# Altium PCB Nahid's.PcbDoc
Units mil, origin at the board's own origin, x right, y up, seen from the top; angles counter-clockwise.
Board outline 2185 x 830 mil, 2 copper layers (Top Layer, Bottom Layer); 13 components, 7 nets, 47 pads, 11 vias.
Unrouted connection lines stored in the file: 2.
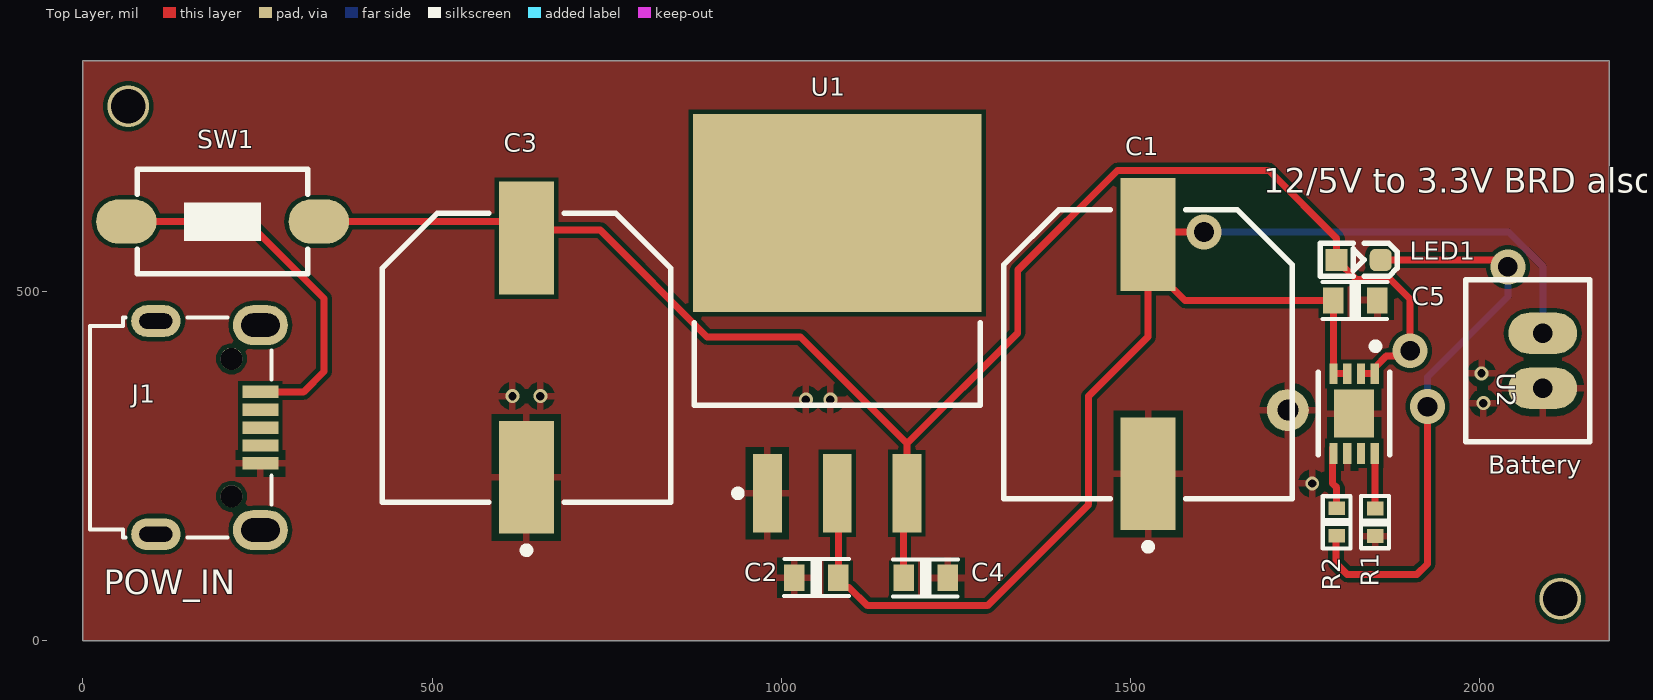
[diagram p0: Top Layer view]
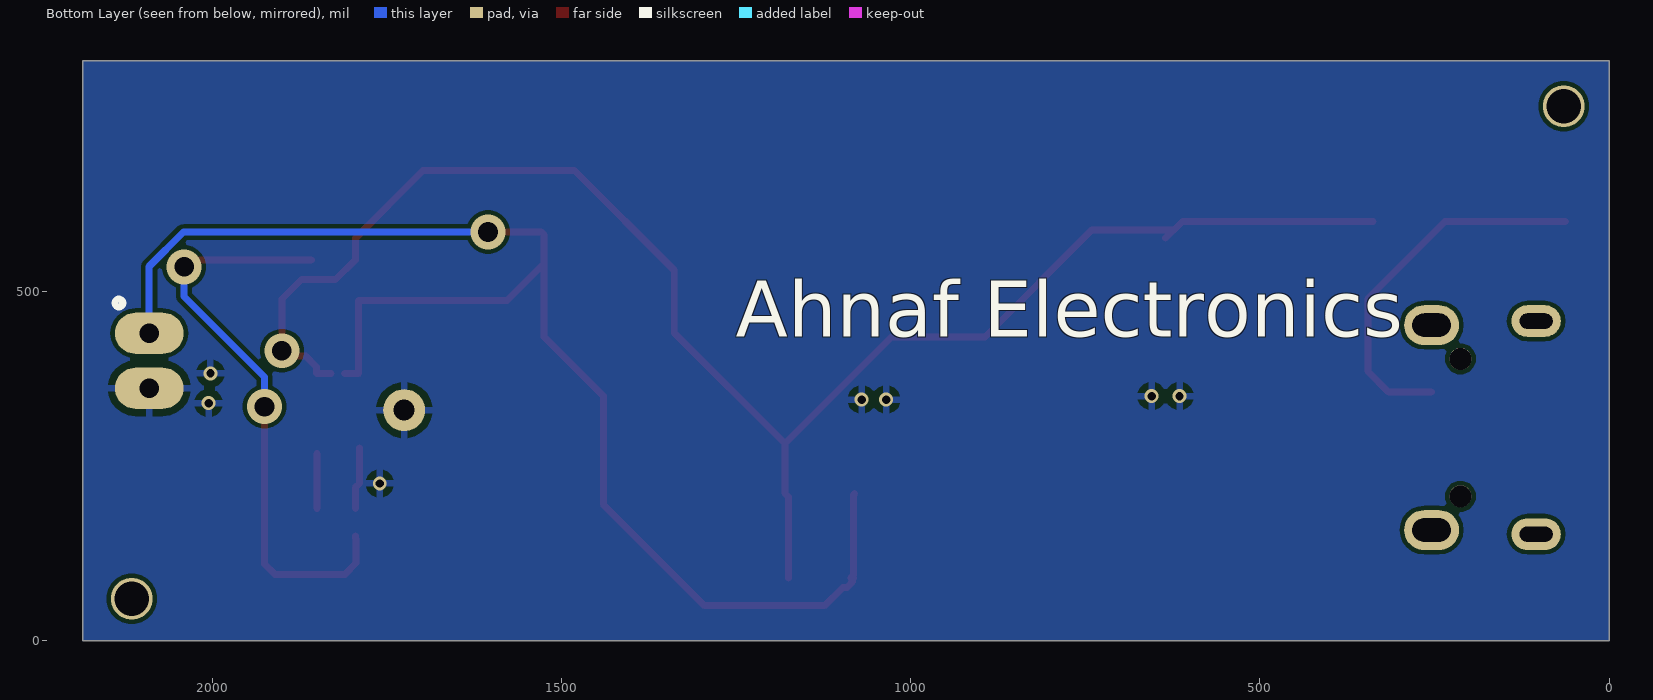
[diagram p1: Bottom Layer view, seen from below]

## Layer stack, top to bottom
Top Solder: solder mask 0.4, Solder Resist, Dk 3.5
Top Layer: signal copper 1.4
Dielectric 1: dielectric 12.6, FR-4, Dk 4.8
Bottom Layer: signal copper 1.4
Bottom Solder: solder mask 0.4, Solder Resist, Dk 3.5

## Board outline
0,0 2185,0 2185,830 0,830

## Design rules (kind name [scope] priority, off if disabled: settings)
Clearance [All] p1: gap=6 ignorepadtopadclearanceinfootprint=TRUE
PolygonConnect [All] p1: connectstyle=Relief reliefconductorwidth=10 reliefentries=4 polygonreliefangle="90 Angle" airgapwidth=10
RoutingVias [All] p1: holewidth=28 width=50 viastyle="Through Hole" minholewidth=28 minwidth=50 maxholewidth=28 maxwidth=50
SolderMaskExpansion [All] p1: expansion=4 istentingtop=FALSE
Width [All] p1: maxlimit=50 minlimit=10 preferedwidth=10
30 further rules are at their usual default settings.

## Classes and differential pairs
component class Nahid's: Battery C2 C3 C4 C5 J1 LED1 R1 R2 SW1 U1 U2

## Components (designator, comment, footprint, x,y, rotation, side; value= is the part's Value field where it differs from the comment)
Battery "Battery" "JST B2B-PH-K" 2090,400.63 r270 top
C1 "22uF" FP-EEH-G-MFG 1525,410 r90 top
C2 "0.1uF" "CAP 0603_1608" 1050,90 r0 top value=100nF
C3 "10uF" FP-EEH-G-MFG 635,405 r90 top
C4 "4.7uF" "CAP 0603_1608" 1206.5,90 r180 top value=100nF
C5 "4.7uF" "CAP 0603_1608" 1821.34,487.09 r180 top value=100nF
J1 "Micro USB 2.0 Type B" 629105150521 140,305 r270 top
LED1 "LED SMD 0603 BLUE" LED_0603_RED 1826.5,545 r0 top
R1 "2KL" "RES 0402_1005" 1850,169.37 r90 top value=1K
R2 "470" "RES 0402_1005" 1795,169.68 r270 top value=1K
SW1 "Tactile 2PIN 6X3.5mm H4.57mm (SMD)" SWPBS_SPST_6X3X5 200,600 r0 top
U1 "LM1117SX-3.3/NOPB" KTT0003B_N 1080,455 r90 top
U2 "MCP73831-2ACI/MC" FP-C04-123-MFG 1820,325 r270 top

## Footprints (in the part's own frame and the unit in brackets; to place one, negate y for a bottom-side part, rotate by r counter-clockwise, add the part's x,y. Pads: shape width x height; smd on the part's side, far side on the other; paste and mask are expansions set on the pad)
629105150521 [mm] "Micro USB 2.0 SMT Type B Horizontal 5 Contacts High Current"
  rect 0.45x1.3 smd: 1(-1.3,2.9) 2(-0.65,2.9) 3(0,2.9) 4(0.65,2.9) 5(1.3,2.9)
  round 0.8 hole 0.8 unplated: M1(-2.5,1.85) M2(2.5,1.85)
  oval 1.45x2 hole 0.85 slot 1.4 at 90 deg: S1(-3.725,2.9) S2(3.725,2.9)
  oval 1.15x1.8 hole 0.55 slot 1.2 at 90 deg: S3(-3.875,-0.9) S4(3.875,-0.9)
  silkscreen extent -4,-3.3 4,3.3, body extent -4,-3.3 4,3.3, height 2.77
"CAP 0603_1608" [mm] "Chip Capacitor, 2-Leads, Body 1.60x0.80mm, IPC Medium Density"
  rect 0.75x0.95 smd: 1(-0.8,0) 2(0.8,0)
  silkscreen extent -1.18,-0.67 1.19,0.68, body extent -0.8,-0.4 0.8,0.42, height 0.82
FP-C04-123-MFG [mm]
  rect 0.75x0.3 smd paste+0 mask+0: 1(-1.45,0.75) 2(-1.45,0.25) 3(-1.45,-0.25) 4(-1.45,-0.75) 5(1.45,-0.75) 6(1.45,-0.25) 7(1.45,0.25) 8(1.45,0.75)
  rect 1.75x1.45 smd paste+0 mask+0: 9(0,0)
  silkscreen extent -2.57,-1.3 1.5,1.3, body extent -1.92,-1.1 1.92,1.1, height 0.25
FP-EEH-G-MFG [mm]
  rect 4.1x2 smd paste+0 mask+0: 1(-4.35,0) 2(4.35,0)
  silkscreen extent -7.12,-5.25 5.25,5.25, body extent -6.65,-5.5 6.65,5.5, height 0.25
"JST B2B-PH-K" [mm]
  oval 1.5x2.5 hole 0.7: 1(-1,0) 2(1,0)
  silkscreen extent -2.95,-2.8 2.95,1.7, body extent -2.95,-2.8 2.95,1.7, height 6
KTT0003B_N [mm] "D2-PAK, 3-Leads, Body 10.41x8.89mm, Pitch 2.54mm, IPC Medium Density"
  rect 2.85x1.05 smd: 1(-6.2,2.54) 2(-6.2,0) 3(-6.2,-2.54)
  rect 7.2x10.5 smd: 4(4,0)
  silkscreen extent -6.32,-5.2 0,5.2, body extent -6.78,-5.2 7.57,5.2, height 4.64
LED_0603_RED [mm] "LED SMD 0603, RED"
  rect 0.8x0.8 smd mask+0.075: 1(-0.8,0)
  rrect50% 0.8x0.8 smd mask+0.075: 2(0.8,0)
  silkscreen extent -1.4,-0.6 1.4,0.6, body extent -0.8,-0.4 0.8,0.4, height 0.5
"RES 0402_1005" [mm] "Chip Resistor, 2-Leads, Body 1.0x0.5mm, IPC Medium Density"
  rect 0.5x0.6 smd: 1(-0.5,0) 2(0.5,0)
  silkscreen extent -0.94,-0.51 0.96,0.51, body extent -0.5,-0.25 0.5,0.25, height 0.35
SWPBS_SPST_6X3X5 [mm] "SWITCH, PUSHBUTTON, SMD, SPST, 6X3.5mm, SKQMBBE010, 50000 Cycles, 1.57N Force"
  oval 2.2x1.6 smd mask+0.1: 1(-3.5,0) 2(3.5,0)
  silkscreen extent -3.1,-1.9 3.1,1.9, body extent -3.65,-1.75 3.65,1.75, height 5

## Part data
Battery: library part "JST BxB-PH-K 2Pin", "Connector Header Through Hole 0.079\" (2.00mm)", PartNumber=B2B-PH-K-S(LF)(SN)
C1 C3: library part CMP-05428-000644-1, "Conductive Polymer Hybrid Aluminum Electrolytic Capacitors 470uF ±20% 25V RADIAL SMT 10x10.2mm", Capacitance=470uF, Case/Package=Radial, ESR (Equivalent Series Resistance)=20mR, Max Operating Temperature=125°C, Min Operating Temperature=-55°C, Ratings=AEC-Q200, Resistor Type=Hybrid, Tolerance=20%, Voltage Rating=25V, Life (Hours)=4000Hour, Mount="Surface Mount", Packaging="Cut Tape", RoHS Compliant=Yes
C2 C4 C5: library part "Cap 0603", "SMT Capacitor"
J1: library part "Micro USB 2.0 Type B Horizontal (SMD) 629105150521", "Micro USB 2.0 Type B Horizontal SMT 5 Contacts High Current WR-COM", Operating Temperature="-40 to 85 degC", PartNumber=629105150521, Rated Current="3 A", ComponentLink1Description=Manufacturer, ComponentLink1URL=http://www.we-online.de, ComponentLink2Description=Datasheet, ComponentLink2URL=http://katalog.we-online.de/em/datasheet/629105150521.pdf, Gender=Female, Interface Type="Micro USB 2.0 Type B", Mounting Technology=SMT, Orientation=Horizontal, Packaging="Tape and Reel", Published Date="May 2018", Publisher="Wurth Elektronik"
R1 R2: library part "Res 0402", "SMT Resistor"
SW1: "Tactile Switch SPST-NO Top Actuated Surface Mount", PartNumber=FSMSMTR-ND
U1: library part CMP-0062-00678-5, "800mA Low-Dropout Linear Regulator, 3-pin TO-263, Pb-Free", Manufacturer="Texas Instruments", PackageTopMarking=NSUZXYTTE#*LM1117S*3.3, PowerWise=N, Code_JEDEC=MO-169-AA, ComponentLink1Description="Datasheet URL", ComponentLink1URL=http://www.ti.com/general/docs/lit/getliterature.tsp?genericPartNumber=LM1117&fileType=pdf, CompType="LDO IC", High-Reliability=Y, PackageDescription="TO-263, Molded, .400 x .390 x .180in, 3 Lead, .1in Pitch, Surface Mount", PackageReference=KTT0003B, PartNumber=LM1117SX-3.3/NOPB, PinCount=3, RoHS=Y
U2: library part CMP-06318-000002-1, "IC CONTROLLER LI-ION 4.2V 8DFN", Ambient Temperature Range High=+85°C, Ambient Temperature Range Low=-40°C, Manufacturer=Microchip, Max Junction Temp=+125°C, Max Supply Voltage=6V, Min Supply Voltage=3.75V, Nominal Supply Current=0.1-510uA, Output Voltage=4.2V, Package=C04-123, Temperature="-40°C to +85°C", Automotive=No, Category=IC, ComponentLink2Description=Datasheet, ComponentLink2URL=http://ww1.microchip.com/downloads/en/DeviceDoc/20001984g.pdf, Device Class L1="Integrated Circuits (ICs)", Device Class L2="Power Management ICs", Device Class L3="Battery Management", Digikey Description="IC CONTROLLER LI-ION 4.2V 8DFN", Footprint Url=http://ww1.microchip.com/downloads/en/DeviceDoc/8L_DFN_2x3x0_9_MC_C04-123C.pdf, Height=1mm, Ipc Land Pattern Name=DFN200X300X90-8, Lead Free=Yes, Manufacturer Part Number=MCP73831-2ACI/MC, Mouser Description="Battery Management Li-Ion/Li-Poly Charg Mgnt 4.2V Vreg out", Number Of Cells=1, Number Of Outputs=1, Octopart=https://octopart.com/mcp73831-2aci%2Fmc-microchip-16517355, RoHS=TRUE, Standoff Height=0mm, Temperature Range High=+85°C, Temperature Range Low=-40°C

## Free pads (board coordinates)
  round 60 hole 50: 2(2115,60) 3(65,765)
  round 60 hole 30: 4(1725,330)

## Via types
v1: diameter 20, hole 12, Top Layer to Bottom Layer, 7 vias
v2: diameter 50, hole 28, Top Layer to Bottom Layer, 4 vias

## Nets (pads, with @x,y where several pads share a name; then routed paths per layer and width w, separated by ;. In a path a pad name is that pad's centre, name@x,y a point inside that pad or via, vN(x,y) a via of type N, cw(c..) or ccw(c..) an arc to the next point about the centre after c; other vN are vias at no path point)
3.3V: Battery.1 C1.2 C2.2 C5.2 U1.2 U2.3 U2.4 | length 2079.1
  Top Layer w10: U1.2 1081.5,209.41 1081.5,93.5 1085,90 C2.2@1083.25,90 ; C2.2 C2.2@1083.25,90 ; v2(1605,585) 1528.74,585 C1.2 C1.2@1525,539.92 ; U2.3 U2.4 1790.16,382.4 1790.16,486.77 C5.2 1577.91,487.09 1559.45,505.55 1559.37,505.55 C1.2@1525,539.92 ; C2.2@1083.25,90 1083.25,84.31 1091.26,76.3 1096.95,76.3 1123.25,50 1295,50 1440,195 1440,350 1525,435 C1.2@1525,539.92
  Bottom Layer w10: v2(1605,585) 2040.91,585 2090,535.91 Battery.1
GND: Battery.2 C1.1 C2.1 C3.1 C4.1 C5.1 J1.5 pad.4 R1.1 U1.1 U2.6 U2.9
  other v1: 1760,225 2005,340 1035,345 1070,345 615,350 655,350 2002.35,382.65
NetJ1_1: J1.1 SW1.1 | length 536.1
  Top Layer w10: SW1.1 235,600 345,490 345,385 316.18,356.18 J1.1
NetLED1_2: LED1.2 R2.2 | length 841.9
  Top Layer w10: R2.2 1795,146.02 1794.14,145.16 1794.14,110.86 1810,95 1910,95 1925,110 v2(1925,335) ; LED1.2 2019.18,545 2029.18,535 v2(2040,535)
  Bottom Layer w10: v2(1925,335) 1925,377.5 2040,492.5 v2(2040,535)
NetR1_2: R1.2 U2.8 | length 79.1
  Top Layer w10: U2.8 1849.76,267.68 1849.76,189.29 R1.2
NetR2_1: R2.1 U2.5 | length 88.6
  Top Layer w10: U2.5@1789.25,275.55 1789.25,224.98 1795,219.23 R2.1
VCC: C3.2 C4.2 LED1.1 SW1.2 U1.3 U2.1 U2.2 | length 2372.6
  Top Layer w10: SW1.2 610.63,600 C3.2@622.82,587.81 ; C3.2 623.44,587.82 C3.2@622.82,587.82 ; C4.2 1175,205.91 U1.3@1177.05,207.95 ; U1.3 1180,235 1180,246.34 1180,282.01 ; U2.2 U2.1 1850.43,382.99 1850.43,391.85 1865.93,407.35 1892.35,407.35 v2(1900,415) 1900,488.94 1872.15,516.79 1823.21,516.79 LED1.1 1795,575.75 1697.78,672.97 1481.07,672.97 1338.37,530.27 1338.37,440.38 1180,282.01 ; C3.2@622.82,587.82 740.68,587.82 893.59,434.91 1027.1,434.91 1180,282.01
pads on no net: J1.2 J1.3 J1.4 J1.M1 J1.M2 J1.S1 J1.S2 J1.S3 J1.S4 U1.4 U2.7

## Polygon pours and split planes (outlines as drawn)
GND on Top Layer "GND_L01_P000" (solid, remove dead copper, pour order 0): 0,0 2185,0 2185,830 0,830
GND on Bottom Layer "GND_L02_P001" (solid, remove dead copper, pour order 1): 0,0 2185,0 2185,830 0,830

## Silkscreen, mask and mechanical layers (free items; w line width, h text height)
Top Overlay:
  text "12/5V to 3.3V BRD also 3.3V battery charging" at 1690,630 h60
  text "POW_IN" at 30,55 h60
Bottom Overlay:
  text "Ahnaf Electronics" at 1250,435 h80

## Text inside footprints (layer, text, board x,y; h text height)
J1: Mechanical 1 "PCB Edge" at 41.57,360.12 h30 r270; Mechanical 1 "PCB Thickness 1.2mm" at -17.48,438.86 h30 r270